# EAGLE board groupe_13 (EAGLE 9.6.2)
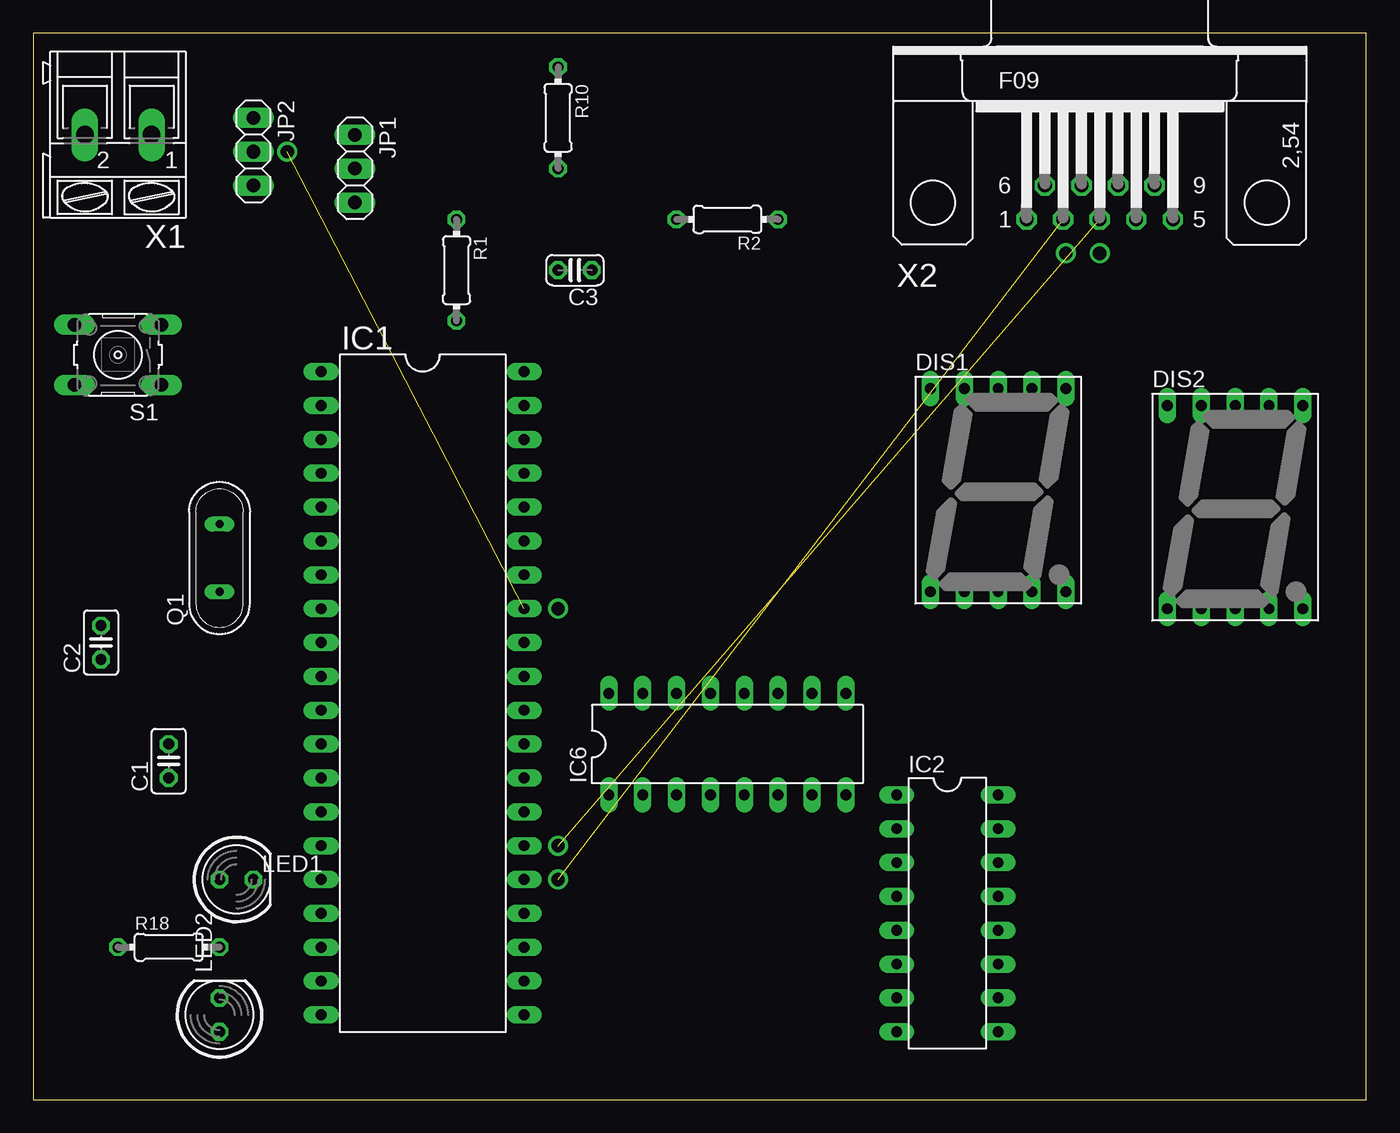
[diagram p0: board, top side]
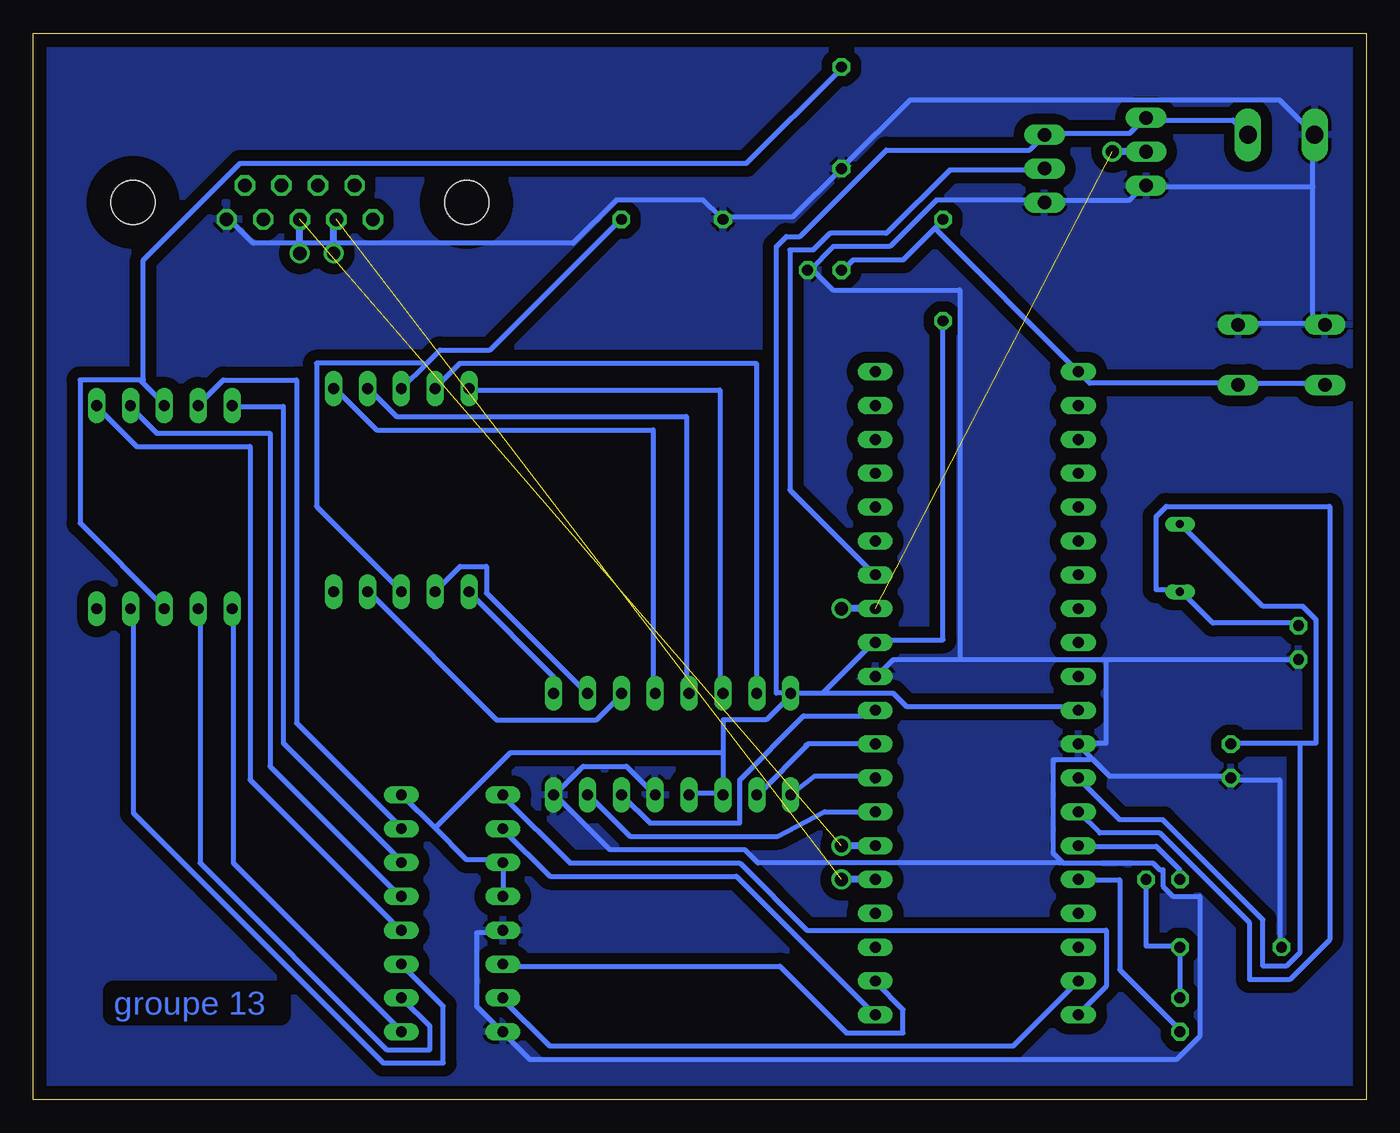
[diagram p1: board, bottom side, seen from below]

Size 100 x 80 mm. Coordinates in mm from the lower left corner, seen from the top.
Outline: 0,0 100,0 100,80 0,80 0,0
Copper layers (1*16): Top 0.035mm / dielectric 1.5mm / Bottom 0.035mm
Design rules "default *": minimum track width 15mil, minimum drill 0.35mm, track to track 15mil, track to pad 15mil, pad to pad 15mil, via to via 15mil, smd to smd 6mil, copper to edge 40mil, drill to drill 6mil, minimum pad ring 10mil, minimum via ring 8mil, stop-mask expansion 4mil, vias tented up to drill 0mil, thermal gap 10mil

## Footprints (pad centres in the part's own frame; a part is rotated, then mirrored left to right if it is on the bottom)
C025-025X050 = drill 0.813 octagon: 1 -1.27,0; 2 1.27,0
C025-024X044 = drill 0.813 octagon: 1 -1.27,0; 2 1.27,0
HDSP-M = drill 0.813 long: 1 -5.08,-7.62; 2 -2.54,-7.62; 3 0,-7.62; 4 2.54,-7.62; 5 5.08,-7.62; 6 5.08,7.62; 7 2.54,7.62; 8 0,7.62; 9 -2.54,7.62; 10 -5.08,7.62
DIL40 = drill 0.813 long: 1 -24.13,-7.62; 2 -21.59,-7.62; 3 -19.05,-7.62; 4 -16.51,-7.62; 5 -13.97,-7.62; 6 -11.43,-7.62; 7 -8.89,-7.62; 8 -6.35,-7.62; 9 -3.81,-7.62; 10 -1.27,-7.62; 11 1.27,-7.62; 12 3.81,-7.62; 13 6.35,-7.62; 14 8.89,-7.62; 15 11.43,-7.62; 16 13.97,-7.62; 17 16.51,-7.62; 18 19.05,-7.62; 19 21.59,-7.62; 20 24.13,-7.62; 21 24.13,7.62; 22 21.59,7.62; 23 19.05,7.62; 24 16.51,7.62; 25 13.97,7.62; 26 11.43,7.62; 27 8.89,7.62; 28 6.35,7.62; 29 3.81,7.62; 30 1.27,7.62; 31 -1.27,7.62; 32 -3.81,7.62; 33 -6.35,7.62; 34 -8.89,7.62; 35 -11.43,7.62; 36 -13.97,7.62; 37 -16.51,7.62; 38 -19.05,7.62; 39 -21.59,7.62; 40 -24.13,7.62
DIL16 = drill 0.813 long: 1 -8.89,-3.81; 2 -6.35,-3.81; 3 -3.81,-3.81; 4 -1.27,-3.81; 5 1.27,-3.81; 6 3.81,-3.81; 7 6.35,-3.81; 8 8.89,-3.81; 9 8.89,3.81; 10 6.35,3.81; 11 3.81,3.81; 12 1.27,3.81; 13 -1.27,3.81; 14 -3.81,3.81; 15 -6.35,3.81; 16 -8.89,3.81
1X03 = drill 1.016 long: 1 -2.54,0; 2 0,0; 3 2.54,0
LED5MM = drill 0.813 octagon: A -1.27,0; K 1.27,0
QS = drill 0.61 long: 1 -2.54,0; 2 2.54,0
0204/7 = drill 0.813 octagon: 1 -3.81,0; 2 3.81,0
B3F-10XX = drill 1.016 long: 1 -3.251,2.261; 2 3.251,2.261; 3 -3.251,-2.261; 4 3.251,-2.261
AK300/2 = drill 1.321 long: 1 -2.515,0; 2 2.489,0
F09H = drill 1.016 octagon: 1 -5.486,-1.27; 2 -2.743,-1.27; 3 0,-1.27; 4 2.743,-1.27; 5 5.486,-1.27; 6 -4.115,1.27; 7 -1.372,1.27; 8 1.372,1.27; 9 4.115,1.27 | hole 3.302: -12.522,0; 12.522,0

## Placement (x,y rotation side)
C1  [C025-025X050]  10.16,25.4 90 top
C2  [C025-025X050]  5.08,34.29 90 top
C3  [C025-024X044]  40.64,62.23 180 top
DIS1  HD-H103  [HDSP-M]  72.39,45.72 0 top
DIS2  HD-H103  [HDSP-M]  90.17,44.45 0 top
IC1  PIC16F877P  [DIL40]  29.21,30.48 270 top
IC2  4511N  [DIL16]  68.58,13.97 270 top
IC6  4511N  [DIL16]  52.07,26.67 0 top
JP1  [1X03]  24.13,69.85 270 top
JP2  [1X03]  16.51,71.12 270 top
LED1  [LED5MM]  15.24,16.51 0 top
LED2  [LED5MM]  13.97,6.35 90 top
Q1  [QS]  13.97,40.64 90 top
R1  [0204/7]  31.75,62.23 270 top
R2  [0204/7]  52.07,66.04 180 top
R10  [0204/7]  39.37,73.66 270 top
R18  [0204/7]  10.16,11.43 0 top
S1  [B3F-10XX]  6.35,55.88 180 top
X1  [AK300/2]  6.35,72.39 180 top
X2  [F09H]  80.01,67.31 0 top

## Library data of the parts
C1-C3 = rcl; SPICEPREFIX: C
DIS1 DIS2 = display-hp; OC_FARNELL: unknown; OC_NEWARK: unknown
IC1 = microchip; MF: MICROCHIP; MPN: PIC16F877-04/P; OC_FARNELL: 9761349; OC_NEWARK: 61K3463
IC2 IC6 = 45xx
JP1 JP2 = pinhead
LED1 LED2 = led
Q1 = special
R1 R2 R10 R18 = rcl; SPICEPREFIX: R
S1 = switch-omron; MPN: B3F-1000; OC_FARNELL: 176432; OC_NEWARK: 36M3542
X1 = con-ptr500; OC_FARNELL: unknown; OC_NEWARK: unknown
X2 = con-subd; OC_FARNELL: unknown; OC_NEWARK: unknown

## Nets
GND: C1.1 C2.1 C3.1 IC1.12 IC1.31 IC2.5 IC2.8 IC6.5 IC6.8 JP1.3 JP2.3 R2.2 R10.2 R18.1 S1.3 S1.4 X1.2 X2.5
N$1: C1.2 IC1.13 Q1.2
N$2: C2.2 IC1.14 Q1.1
N$3: C3.2 IC1.1 R1.1 S1.1 S1.2
N$4: IC1.19 IC2.7
N$5: IC1.20 IC2.1
N$6: IC1.21 IC2.2
N$7: IC1.22 IC2.6
N$8: IC1.27 IC6.7
N$9: IC1.28 IC6.1
N$10: IC1.29 IC6.2
N$11: IC1.30 IC6.6
N$12: DIS1.7 IC6.13
N$13: DIS1.6 IC6.12
N$14: DIS1.4 IC6.11
N$15: DIS1.2 IC6.10
N$16: DIS1.1 IC6.9
N$17: DIS1.9 IC6.15
N$18: DIS1.10 IC6.14
N$19: DIS2.10 IC2.14
N$20: DIS2.9 IC2.15
N$21: DIS2.1 IC2.9
N$22: DIS2.2 IC2.10
N$23: DIS2.4 IC2.11
N$24: DIS2.6 IC2.12
N$25: DIS2.7 IC2.13
N$26: DIS1.3 DIS1.8 R2.1
N$41: DIS2.3 DIS2.8 R10.1
N$42: IC1.15 LED1.A
N$43: IC1.16 LED2.A
N$44: LED1.K LED2.K R18.2
N$45: IC1.25 X2.2
N$46: IC1.26 X2.3
N$51: IC1.33 JP2.2
N$52: IC1.34 JP1.2
VCC: IC1.11 IC1.32 IC2.3 IC2.4 IC2.16 IC6.3 IC6.4 IC6.16 JP1.1 JP2.1 R1.2 X1.1

## Tracks (layer width: path | path; a pad name or v marks a point on that pad's centre or on a via)
GND
  Bottom 0.381: 19.5,33 5.25,33 C2.1 | 19.5,33 30.5,33 | 30.5,33 35.5,33 36.75,31.75 IC1.31 | IC6.5 53.5,23 55.5,25 58.75,25 60.75,23 IC6.8 60.75,22.75 56.75,18.75 46.62,18.75 45.62,17.75 23,17.75 22.88,17.88 | IC2.5 65,12.5 66.75,12.5 66.75,7 65,5.25 IC2.8 64.75,5 62.75,3 14.25,3 12.5,4.75 12.5,15.25 14.5,15.25 15.25,16 15.25,17.25 15.5,17.25 16,17.75 22.75,17.75 22.88,17.88 | R18.1 6.5,11.5 6.5,24 10,24 C1.1 10.25,24.25 19.25,24.25 20.62,25.62 | 20.62,25.62 21.5,26.5 IC1.12 21.5,26.75 19.5,26.75 19.5,33 | 22.88,17.88 23.5,18.5 23.5,25.5 20.75,25.5 20.62,25.62 | X2.5 85.25,66 83.5,64.25 59.5,64.25 56.25,67.5 49.75,67.5 48.5,66.25 R2.2 48.25,66.25 43,66.25 39.5,69.75 R10.2 39.25,70 34.25,75 6.5,75 4,72.5 X1.2 4,72.25 4,68.5 | 4,58.25 9.5,58.25 S1.3 | 4,58.25 3.25,58.25 S1.4 4,58.25 | 4,58.25 4,68.5 | 4,68.5 16.5,68.5 JP2.3 16.75,68.5 17.75,67.5 24,67.5 JP1.3 24.25,67.5 32.25,67.5 35.75,64 40,64 41.75,62.25 C3.1 41.5,62.25 40,60.75 30.5,60.75 30.5,33
  pour Bottom (isolate 0.813): 0,80.01 100.33,80.01 100.33,0 0,0
N$1
  Bottom 0.381: 5,26.75 10,26.75 C1.2 | 5,26.75 3.75,26.75 3.75,36 4.75,37 7.75,37 13.75,43 Q1.2 | 5,26.75 5,11 6,10 7.75,10 7.75,13.5 15.25,21 18.5,21 21.5,24 IC1.13
N$2
  Bottom 0.381: C2.2 5.25,35.75 11.5,35.75 13.75,38 Q1.1 14,38.25 15.75,38.25 15.75,43.75 15,44.5 2.75,44.5 2.75,12 5.75,9 8.75,9 8.75,13.25 15.5,20 20,20 IC1.14
N$3
  Bottom 0.381: 32.38,65.38 31.75,66 R1.1 | 32.38,65.38 34.75,63 38.5,63 39.25,62.25 C3.2 | S1.2 3.25,53.75 9.5,53.75 S1.1 9.75,53.75 20.75,53.75 21.5,54.5 IC1.1 21.75,54.75 32.38,65.38
N$4
  Bottom 0.381: IC2.7 64.75,7.5 61.25,4 26.5,4 21.75,8.75 IC1.19
N$5
  Bottom 0.381: IC1.20 21.5,6.5 19.5,8.5 19.5,12.71 41.96,12.71 47,17.75 59.75,17.75 64.75,22.75 IC2.1
N$6
  Bottom 0.381: IC1.21 37,6.5 47.25,16.75 61.25,16.75 64.75,20.25 IC2.2
N$7
  Bottom 0.381: IC1.22 36.75,8.75 34.75,6.75 34.75,5 39,5 44,10 64.75,10 IC2.6
N$8
  Bottom 0.381: IC1.27 40.64,21.59 44.12,19.75 55.25,19.75 58.25,22.75 IC6.7
N$9
  Bottom 0.381: IC1.28 36.97,24.27 41.37,24.27 IC6.1
N$10
  Bottom 0.381: IC1.29 41.91,26.67 42.06,26.52 41.98,26.52 45.5,23 IC6.2
N$11
  Bottom 0.381: IC1.30 37,29 37.21,28.79 42.21,28.79 47,24 47,20.75 53.75,20.75 55.75,22.75 IC6.6
N$12
  Bottom 0.381: IC6.13 51,30.5 51,51.25 72.75,51.25 74.75,53.25 DIS1.7
N$13
  Bottom 0.381: IC6.12 53.5,30.5 53.5,50.25 74.25,50.25 77.25,53.25 DIS1.6
N$14
  Bottom 0.381: IC6.11 56,30.25 57.75,28.5 65.25,28.5 74.75,38 DIS1.4
N$15
  Bottom 0.381: IC6.10 58.5,30.5 66,38 66,40 68,40 69.75,38.25 DIS1.2
N$16
  Bottom 0.381: IC6.9 61,30.5 61,31.75 67.25,38 DIS1.1
N$17
  Bottom 0.381: IC6.15 45.75,30.5 45.75,55.25 68,55.25 69.75,53.5 DIS1.9
N$18
  Bottom 0.381: IC6.14 48.5,30.5 48.5,53.25 67.25,53.25 DIS1.10
N$19
  Bottom 0.381: IC2.14 72.5,18 81.25,26.75 81.25,52 85,52 DIS2.10
N$20
  Bottom 0.381: IC2.15 72.5,20.5 80.25,28.25 80.25,54 85.75,54 87.5,52.25 DIS2.9
N$21
  Bottom 0.381: IC2.9 72.5,5.25 85,17.75 85,36.75 DIS2.1
N$22
  Bottom 0.381: IC2.10 72.25,7.5 70.25,5.5 70.25,3.75 73.5,3.75 87.5,17.75 87.5,36.75 DIS2.2
N$23
  Bottom 0.381: IC2.11 72.25,10 69.25,7 69.25,2.75 73.75,2.75 92.5,21.5 92.5,36.75 DIS2.4
N$24
  Bottom 0.381: IC2.12 72.5,12.75 83.75,24 83.75,49 92.25,49 95.25,52 DIS2.6
N$25
  Bottom 0.381: IC2.13 72.5,15.25 82.25,25 82.25,50 90.75,50 92.75,52 DIS2.7
N$26
  Bottom 0.381: 70.62,55.12 72.25,53.5 DIS1.8 | 70.62,55.12 69.5,56.25 65.75,56.25 56,66 R2.1 | DIS1.3 72.5,38.25 78.75,44.5 78.75,55.25 70.75,55.25 70.62,55.12
N$41
  Bottom 0.381: 91.88,53.88 90.25,52.25 DIS2.8 | 91.88,53.88 92,54 96.5,54 96.5,43.25 90.25,37 DIS2.3 | R10.1 39.5,77.25 46.5,70.25 84.5,70.25 91.75,63 91.75,54 91.88,53.88
N$42
  Bottom 0.381: LED1.A 14,16.75 14,17.25 15.75,19 21.5,19 IC1.15
N$43
  Bottom 0.381: LED2.A 14,5.25 18.5,9.75 18.5,16.5 21.5,16.5 IC1.16
N$44
  Bottom 0.381: LED2.K 14,7.75 14,11.25 R18.2 14,11.5 16.5,11.5 LED1.K
N$45  (1 unrouted)
  Bottom 0.508: IC1.25 39.37,16.51
N$46  (1 unrouted)
  Bottom 0.508: IC1.26 39.37,19.05
N$51  (1 unrouted)
  Bottom 0.508: JP2.2 19.05,71.12 | IC1.33 39.37,36.83
N$52
  Bottom 0.381: IC1.34 37,39.5 43.25,45.75 43.25,63.75 41.5,63.75 40.25,65 36,65 31.25,69.75 24.25,69.75 JP1.2
S$1  (via drill 1 pad 1.3)
  other vias: 19.05,71.12
S$2  (via drill 1 pad 1.3)
  other vias: 39.37,36.83
S$3  (via drill 1 pad 1.3)
  other vias: 39.37,16.51
S$4  (via drill 1 pad 1.3)
  other vias: 39.37,19.05
S$5  (via drill 1 pad 1.3)
  Bottom 0.508: v77.47,63.5 77.47,66.04
S$6  (via drill 1 pad 1.3)
  Bottom 0.508: v80.01,63.5 80.01,66.04
VCC
  Bottom 0.381: X1.1 9,72.5 10,73.5 16.5,73.5 JP2.1 16.75,73.5 17.75,72.5 24,72.5 JP1.1 24.25,72.25 25.25,71.25 36,71.25 42.5,64.75 43.5,64.75 44.25,64 44.25,30.5 43.25,30.5 IC6.16 | IC2.4 64.75,15.25 64.75,17.75 IC2.3 65,18 67.5,18 69.88,20.38 | 69.88,20.38 72.25,22.75 IC2.16 | IC6.4 50.75,23 48.5,23 IC6.3 48.25,23 48.25,26 | 40.75,30.5 43,30.5 IC6.16 | 40.75,30.5 35.5,30.5 34.5,29.5 22,29.5 21.75,29.25 IC1.11 | 40.75,30.5 37,34.25 IC1.32 36.75,34.5 31.75,34.5 R1.2 | 48.25,26 48.25,28.5 45,28.5 43.25,30.25 IC6.16 | 69.88,20.38 64.25,26 48.25,26

## Text on the board
Bottom: groupe 13